# EAGLE board Panelized-CC3-MPI-26-3124-Satellite-Board-CoCo-3-Upgrade-2009-V1RA (EAGLE 9.4.0)
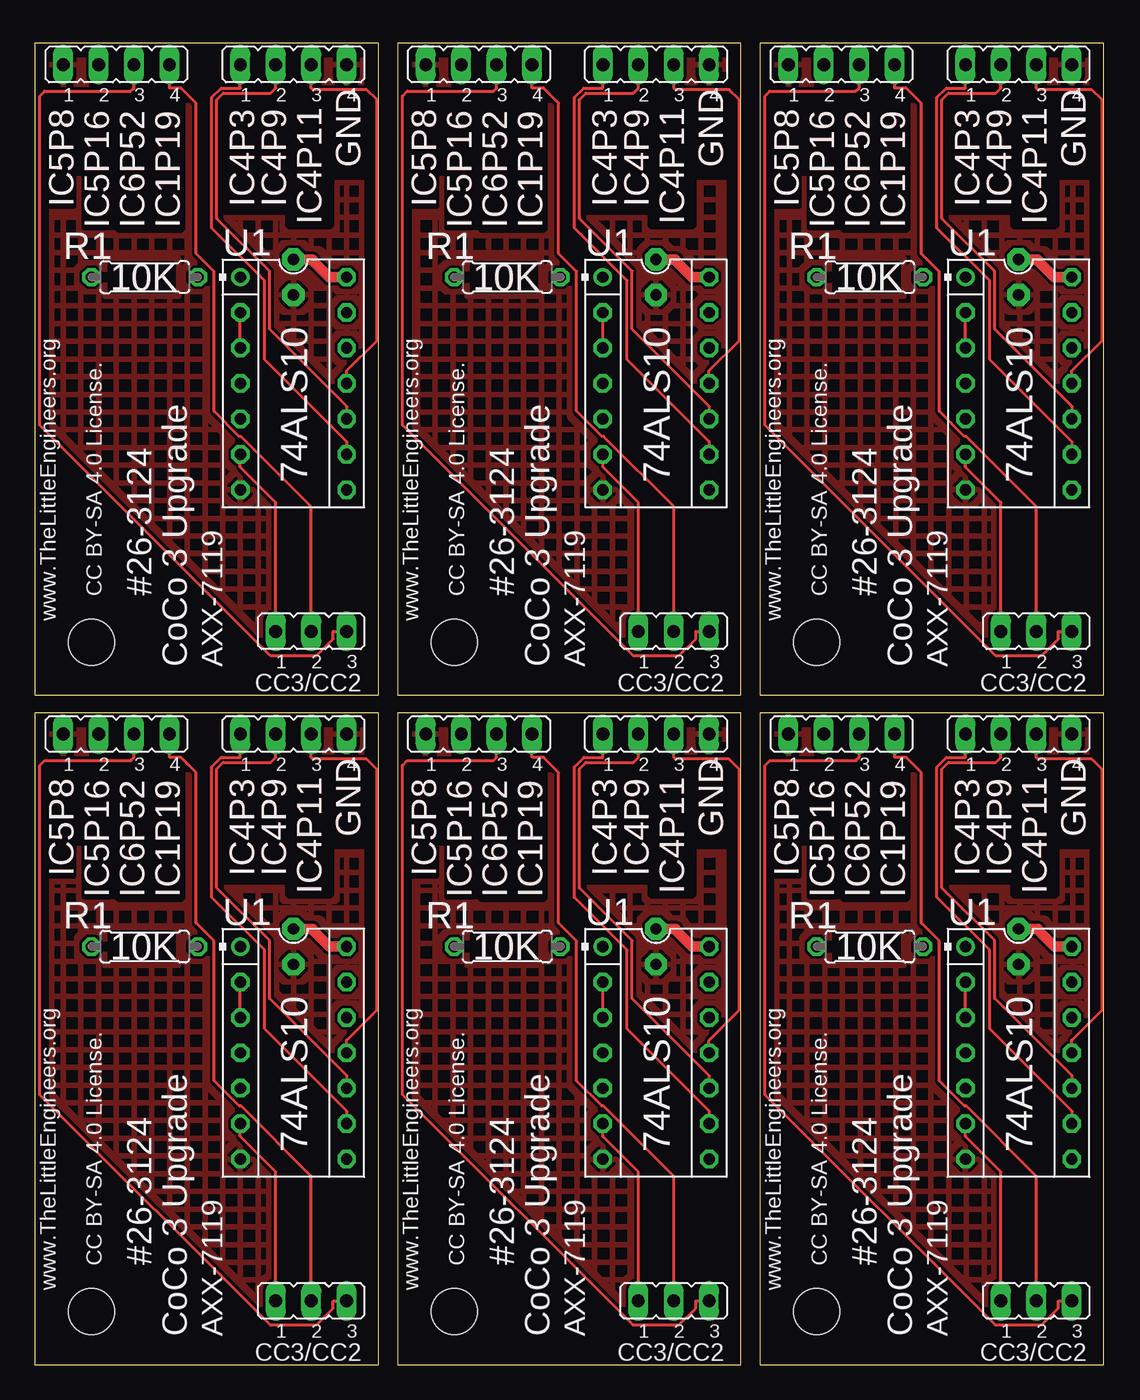
[diagram p0: board, top side]
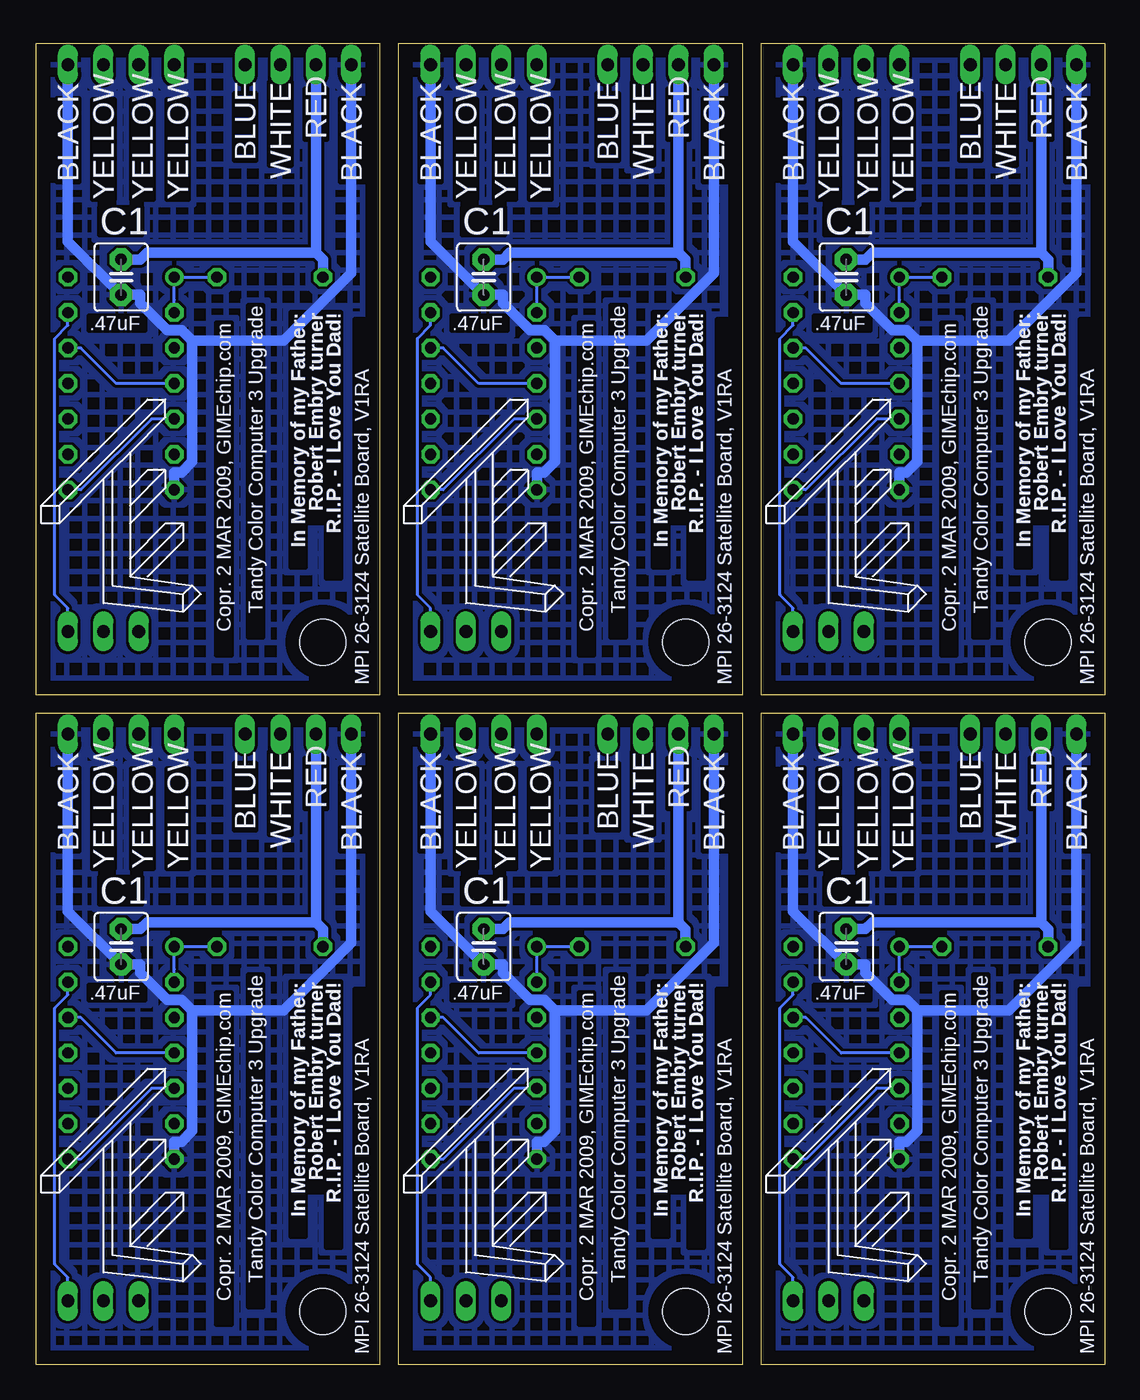
[diagram p1: board, bottom side, seen from below]

Size 76.64 x 94.74 mm. Coordinates in mm from the lower left corner, seen from the top.
Outline: 0,94.74 0,48 24.64,48 24.64,94.74 0,94.74
Outline: 0,46.74 0,0 24.64,0 24.64,46.74 0,46.74
Outline: 26,94.74 26,48 50.64,48 50.64,94.74 26,94.74
Outline: 26,46.74 26,0 50.64,0 50.64,46.74 26,46.74
Outline: 52,94.74 52,48 76.64,48 76.64,94.74 52,94.74
Outline: 52,46.74 52,0 76.64,0 76.64,46.74 52,46.74
Copper layers (1*16): Top 0.035mm / dielectric 1.5mm / Bottom 0.035mm
Design rules "default": minimum track width 10mil, minimum drill 24mil, track to track 8mil, track to pad 8mil, pad to pad 8mil, via to via 8mil, smd to smd 8mil, copper to edge 40mil, drill to drill 8mil, minimum pad ring 10mil, minimum via ring 8mil, stop-mask expansion 4mil, vias tented up to drill 0mil, thermal gap 10mil
Net classes: 0 default: width 0.203 mm, clearance 0.152 mm; 1 power: width 0.762 mm, clearance 0.203 mm
tRestrict: area 1,81.5 to 10.4,90.7; area 13.7,81.8 to 23.9,90.4; area 1,33.5 to 10.4,42.7; area 13.7,33.8 to 23.9,42.4; area 27,81.5 to 36.4,90.7; area 39.7,81.8 to 49.9,90.4; area 27,33.5 to 36.4,42.7; area 39.7,33.8 to 49.9,42.4; area 53,81.5 to 62.4,90.7; area 65.7,81.8 to 75.9,90.4; area 53,33.5 to 62.4,42.7; area 65.7,33.8 to 75.9,42.4

## Footprints (pad centres in the part's own frame; a part is rotated, then mirrored left to right if it is on the bottom)
C2.5-4 = drill 0.813 pad 1.6 octagon: 1 -1.27,0; 2 1.27,0
DIL14-3 = drill 0.813: 1 -7.62,-3.81 | drill 0.813 octagon: 2 -5.08,-3.81; 3 -2.54,-3.81; 4 0,-3.81; 5 2.54,-3.81; 6 5.08,-3.81; 7 7.62,-3.81; 8 7.62,3.81; 9 5.08,3.81; 10 2.54,3.81; 11 0,3.81; 12 -2.54,3.81; 13 -5.08,3.81; 14 -7.62,3.81
JP4 = drill 0.914 long: 1 -3.81,0; 2 -1.27,0; 3 1.27,0; 4 3.81,0
JP2 = drill 0.914 long: 1 -2.54,0; 2 0,0; 3 2.54,0
0207/7 = drill 0.813 octagon: 1 -3.81,0; 2 3.81,0
SPARKFUN_STAND-OFF = hole 3.302: 0,0

## Placement (x,y rotation side)
C1  .47uF  [C2.5-4]  18.54,77.97 270 bottom
C2  .47uF  [C2.5-4]  18.54,29.97 270 bottom
C3  .47uF  [C2.5-4]  44.54,77.97 270 bottom
C4  .47uF  [C2.5-4]  44.54,29.97 270 bottom
C5  .47uF  [C2.5-4]  70.54,77.97 270 bottom
C6  .47uF  [C2.5-4]  70.54,29.97 270 bottom
IC1  74ALS10N  [DIL14-3]  18.54,70.35 270 top
IC2  74ALS10N  [DIL14-3]  18.54,22.35 270 top
IC3  74ALS10N  [DIL14-3]  44.54,70.35 270 top
IC4  74ALS10N  [DIL14-3]  44.54,22.35 270 top
IC5  74ALS10N  [DIL14-3]  70.54,70.35 270 top
IC6  74ALS10N  [DIL14-3]  70.54,22.35 270 top
JP1  [JP4]  5.84,93.21 0 top
JP2  CC3/CC2  [JP2]  19.81,52.57 0 top
JP3  [JP4]  18.54,93.21 0 top
JP4  CC3/CC2  [JP2]  19.81,4.57 0 top
JP5  [JP4]  5.84,45.21 0 top
JP6  [JP4]  18.54,45.21 0 top
JP7  CC3/CC2  [JP2]  45.81,52.57 0 top
JP8  [JP4]  31.84,93.21 0 top
JP9  [JP4]  44.54,93.21 0 top
JP10  CC3/CC2  [JP2]  45.81,4.57 0 top
JP11  [JP4]  31.84,45.21 0 top
JP12  [JP4]  44.54,45.21 0 top
JP13  CC3/CC2  [JP2]  71.81,52.57 0 top
JP14  [JP4]  57.84,93.21 0 top
JP15  [JP4]  70.54,93.21 0 top
JP16  CC3/CC2  [JP2]  71.81,4.57 0 top
JP17  [JP4]  57.84,45.21 0 top
JP18  [JP4]  70.54,45.21 0 top
R1  10K  [0207/7]  7.87,77.97 180 top
R2  10K  [0207/7]  7.87,29.97 180 top
R3  10K  [0207/7]  33.87,77.97 180 top
R4  10K  [0207/7]  33.87,29.97 180 top
R5  10K  [0207/7]  59.87,77.97 180 top
R6  10K  [0207/7]  59.87,29.97 180 top
U$1  SPARKFUN_STAND-OFF  [SPARKFUN_STAND-OFF]  4.06,51.81 0 top
U$2  [TLE-LOGO-13]  19.81,54.6 0 bottom
U$3  SPARKFUN_STAND-OFF  [SPARKFUN_STAND-OFF]  4.06,3.81 0 top
U$4  [TLE-LOGO-13]  19.81,6.6 0 bottom
U$5  SPARKFUN_STAND-OFF  [SPARKFUN_STAND-OFF]  30.06,51.81 0 top
U$6  [TLE-LOGO-13]  45.81,54.6 0 bottom
U$7  SPARKFUN_STAND-OFF  [SPARKFUN_STAND-OFF]  30.06,3.81 0 top
U$8  [TLE-LOGO-13]  45.81,6.6 0 bottom
U$9  SPARKFUN_STAND-OFF  [SPARKFUN_STAND-OFF]  56.06,51.81 0 top
U$10  [TLE-LOGO-13]  71.81,54.6 0 bottom
U$11  SPARKFUN_STAND-OFF  [SPARKFUN_STAND-OFF]  56.06,3.81 0 top
U$12  [TLE-LOGO-13]  71.81,6.6 0 bottom

## Library data of the parts
C1-C6 = capacitor-wima
IC1-IC6 = RetroZilla.org-74xx-us
JP1-JP18 = jumper
R1-R6 = rcl-2
U$1 U$3 U$5 U$7 U$9 U$11 = FDC
U$2 U$4 U$6 U$8 U$10 U$12 = TLE_LOGOS

## Nets
CC1: IC2.6 JP4.1
CC2: IC3.6 JP7.1
CC3: IC1.6 JP2.1
CC4: IC4.6 JP10.1
CC5: IC5.6 JP13.1
CC6: IC6.6 JP16.1
GND [power]: C1.2 IC1.7 JP1.1 JP3.4
GND1 [power]: C2.2 IC2.7 JP5.1 JP6.4
GND2 [power]: C3.2 IC3.7 JP8.1 JP9.4
GND3 [power]: C4.2 IC4.7 JP11.1 JP12.4
GND4 [power]: C5.2 IC5.7 JP14.1 JP15.4
GND5 [power]: C6.2 IC6.7 JP17.1 JP18.4
IC1P1: JP4.2 JP5.4
IC1P2: JP7.2 JP8.4
IC1P3: JP10.2 JP11.4
IC1P4: JP13.2 JP14.4
IC1P5: JP16.2 JP17.4
IC1P19: JP1.4 JP2.2
IC4P1: IC2.9 JP6.1
IC4P2: IC2.10 JP6.2
IC4P3: IC1.9 JP3.1
IC4P4: IC2.11 JP6.3
IC4P5: IC3.9 JP9.1
IC4P6: IC3.10 JP9.2
IC4P7: IC3.11 JP9.3
IC4P8: IC4.9 JP12.1
IC4P9: IC1.10 JP3.2
IC4P10: IC4.10 JP12.2
IC4P11: IC1.11 JP3.3
IC4P12: IC4.11 JP12.3
IC4P13: IC5.9 JP15.1
IC4P14: IC5.10 JP15.2
IC4P15: IC5.11 JP15.3
IC4P16: IC6.9 JP18.1
IC4P17: IC6.10 JP18.2
IC4P18: IC6.11 JP18.3
IC6P1: IC2.13 JP4.3 JP5.3
IC6P2: IC3.13 JP7.3 JP8.3
IC6P3: IC4.13 JP10.3 JP11.3
IC6P4: IC5.13 JP13.3 JP14.3
IC6P5: IC6.13 JP16.3 JP17.3
IC6P52: IC1.13 JP1.3 JP2.3
N$1: IC2.1 IC2.2 IC2.3 R2.1
N$2: IC2.4 IC2.12
N$3: IC2.5 IC2.8
N$4: IC3.1 IC3.2 IC3.3 R3.1
N$5: IC3.4 IC3.12
N$6: IC1.1 IC1.2 IC1.3 R1.1
N$7: IC3.5 IC3.8
N$8: IC1.4 IC1.12
N$9: IC1.5 IC1.8
N$10: IC4.1 IC4.2 IC4.3 R4.1
N$11: IC4.4 IC4.12
N$12: IC4.5 IC4.8
N$13: IC5.1 IC5.2 IC5.3 R5.1
N$14: IC5.4 IC5.12
N$15: IC5.5 IC5.8
N$16: IC6.1 IC6.2 IC6.3 R6.1
N$17: IC6.4 IC6.12
N$18: IC6.5 IC6.8
VCC [power]: C1.1 IC1.14 JP1.2 R1.2
VCC1 [power]: C2.1 IC2.14 JP5.2 R2.2
VCC2 [power]: C3.1 IC3.14 JP8.2 R3.2
VCC3 [power]: C4.1 IC4.14 JP11.2 R4.2
VCC4 [power]: C5.1 IC5.14 JP14.2 R5.2
VCC5 [power]: C6.1 IC6.14 JP17.2 R6.2

## Tracks (layer width: path | path; a pad name or v marks a point on that pad's centre or on a via)
CC1
  Top 0.203: IC2.6 14.73,16.36 17.27,13.82 JP4.1
CC2
  Top 0.203: IC3.6 40.73,64.36 43.27,61.82 JP7.1
CC3
  Top 0.203: IC1.6 14.73,64.36 17.27,61.82 JP2.1
CC4
  Top 0.203: IC4.6 40.73,16.36 43.27,13.82 JP10.1
CC5
  Top 0.203: IC5.6 66.73,64.36 69.27,61.82 JP13.1
CC6
  Top 0.203: IC6.6 66.73,16.36 69.27,13.82 JP16.1
GND
  Bottom 0.762: 13.44,73.4 13.44,64.76 14.22,63.98 14.73,63.98 IC1.7 | 13.44,73.4 14.19,74.16 15.22,74.16 17.16,76.1 17.16,76.7 C1.2 22.35,80.51 JP3.4 | JP1.1 2.03,78.24 6.87,73.4 13.44,73.4
  pour Top (hatched): -0.51,95.75 24.89,95.75 24.89,47.49 -0.51,47.49
  pour Bottom (hatched): -0.51,95.75 24.89,95.75 24.89,47.49 -0.51,47.49
GND1
  Bottom 0.762: 13.44,25.4 13.44,16.76 14.22,15.98 14.73,15.98 IC2.7 | 13.44,25.4 14.19,26.16 15.22,26.16 17.16,28.1 17.16,28.7 C2.2 22.35,32.51 JP6.4 | JP5.1 2.03,30.24 6.87,25.4 13.44,25.4
  pour Top (hatched): -0.51,47.75 24.89,47.75 24.89,-0.51 -0.51,-0.51
  pour Bottom (hatched): -0.51,47.75 24.89,47.75 24.89,-0.51 -0.51,-0.51
GND2
  Bottom 0.762: 39.44,73.4 39.44,64.76 40.22,63.98 40.73,63.98 IC3.7 | 39.44,73.4 40.19,74.16 41.22,74.16 43.16,76.1 43.16,76.7 C3.2 48.35,80.51 JP9.4 | JP8.1 28.03,78.24 32.87,73.4 39.44,73.4
  pour Top (hatched): 25.49,95.75 50.89,95.75 50.89,47.49 25.49,47.49
  pour Bottom (hatched): 25.49,95.75 50.89,95.75 50.89,47.49 25.49,47.49
GND3
  Bottom 0.762: 39.44,25.4 39.44,16.76 40.22,15.98 40.73,15.98 IC4.7 | 39.44,25.4 40.19,26.16 41.22,26.16 43.16,28.1 43.16,28.7 C4.2 48.35,32.51 JP12.4 | JP11.1 28.03,30.24 32.87,25.4 39.44,25.4
  pour Top (hatched): 25.49,47.75 50.89,47.75 50.89,-0.51 25.49,-0.51
  pour Bottom (hatched): 25.49,47.75 50.89,47.75 50.89,-0.51 25.49,-0.51
GND4
  Bottom 0.762: 65.44,73.4 65.44,64.76 66.22,63.98 66.73,63.98 IC5.7 | 65.44,73.4 66.19,74.16 67.22,74.16 69.16,76.1 69.16,76.7 C5.2 74.35,80.51 JP15.4 | JP14.1 54.03,78.24 58.87,73.4 65.44,73.4
  pour Top (hatched): 51.49,95.75 76.89,95.75 76.89,47.49 51.49,47.49
  pour Bottom (hatched): 51.49,95.75 76.89,95.75 76.89,47.49 51.49,47.49
GND5
  Bottom 0.762: 65.44,25.4 65.44,16.76 66.22,15.98 66.73,15.98 IC6.7 | 65.44,25.4 66.19,26.16 67.22,26.16 69.16,28.1 69.16,28.7 C6.2 74.35,32.51 JP18.4 | JP17.1 54.03,30.24 58.87,25.4 65.44,25.4
  pour Top (hatched): 51.49,47.75 76.89,47.75 76.89,-0.51 51.49,-0.51
  pour Bottom (hatched): 51.49,47.75 76.89,47.75 76.89,-0.51 51.49,-0.51
IC1P1
  Top 0.203: JP5.4 9.65,43.54 10.48,43.54 11.56,42.45 11.56,31.67 12.85,30.37 12.85,20.36 14.66,18.54 14.79,18.54 19.81,13.52 JP4.2
IC1P2
  Top 0.203: JP8.4 35.65,91.53 36.48,91.53 37.56,90.45 37.56,79.67 38.85,78.37 38.85,68.36 40.66,66.54 40.79,66.54 45.81,61.52 JP7.2
IC1P3
  Top 0.203: JP11.4 35.65,43.54 36.48,43.54 37.56,42.45 37.56,31.67 38.85,30.37 38.85,20.36 40.66,18.54 40.79,18.54 45.81,13.52 JP10.2
IC1P4
  Top 0.203: JP14.4 61.65,91.53 62.48,91.53 63.56,90.45 63.56,79.67 64.85,78.37 64.85,68.36 66.67,66.54 66.79,66.54 71.81,61.52 JP13.2
IC1P5
  Top 0.203: JP17.4 61.65,43.54 62.48,43.54 63.56,42.45 63.56,31.67 64.85,30.37 64.85,20.36 66.67,18.54 66.79,18.54 71.81,13.52 JP16.2
IC1P19
  Top 0.203: JP1.4 9.65,91.53 10.48,91.53 11.56,90.45 11.56,79.67 12.85,78.37 12.85,68.36 14.66,66.54 14.79,66.54 19.81,61.52 JP2.2
IC4P1
  Top 0.203: IC2.9 22.35,18.19 16.46,24.08 16.46,29.73 12.69,33.5 12.69,42.86 13.37,43.54 14.73,43.54 JP6.1
IC4P2
  Top 0.203: IC2.10 22.35,20.73 16.82,26.26 16.82,30.41 13.05,34.18 13.05,42.71 13.52,43.18 16.92,43.18 17.27,43.54 JP6.2
IC4P3
  Top 0.203: IC1.9 22.35,66.19 16.46,72.08 16.46,77.72 12.69,81.5 12.69,90.86 13.37,91.53 14.73,91.53 JP3.1
IC4P4
  Top 0.203: IC2.11 22.35,23.27 24.52,25.44 24.52,42.68 23.78,43.42 19.93,43.42 19.81,43.54 JP6.3
IC4P5
  Top 0.203: IC3.9 48.35,66.19 42.46,72.08 42.46,77.72 38.69,81.5 38.69,90.86 39.37,91.53 40.73,91.53 JP9.1
IC4P6
  Top 0.203: IC3.10 48.35,68.73 42.82,74.26 42.82,78.41 39.05,82.18 39.05,90.71 39.52,91.18 42.92,91.18 43.27,91.53 JP9.2
IC4P7
  Top 0.203: IC3.11 48.35,71.27 50.52,73.44 50.52,90.68 49.78,91.42 45.92,91.42 45.81,91.53 JP9.3
IC4P8
  Top 0.203: IC4.9 48.35,18.19 42.46,24.08 42.46,29.73 38.69,33.5 38.69,42.86 39.37,43.54 40.73,43.54 JP12.1
IC4P9
  Top 0.203: IC1.10 22.35,68.73 16.82,74.26 16.82,78.41 13.05,82.18 13.05,90.71 13.52,91.18 16.92,91.18 17.27,91.53 JP3.2
IC4P10
  Top 0.203: IC4.10 48.35,20.73 42.82,26.26 42.82,30.41 39.05,34.18 39.05,42.71 39.52,43.18 42.92,43.18 43.27,43.54 JP12.2
IC4P11
  Top 0.203: IC1.11 22.35,71.27 24.52,73.44 24.52,90.68 23.78,91.42 19.93,91.42 19.81,91.53 JP3.3
IC4P12
  Top 0.203: IC4.11 48.35,23.27 50.52,25.44 50.52,42.68 49.78,43.42 45.92,43.42 45.81,43.54 JP12.3
IC4P13
  Top 0.203: IC5.9 74.35,66.19 68.46,72.08 68.46,77.72 64.69,81.5 64.69,90.86 65.37,91.53 66.73,91.53 JP15.1
IC4P14
  Top 0.203: IC5.10 74.35,68.73 68.82,74.26 68.82,78.41 65.05,82.18 65.05,90.71 65.52,91.18 68.92,91.18 69.27,91.53 JP15.2
IC4P15
  Top 0.203: IC5.11 74.35,71.27 76.52,73.44 76.52,90.68 75.78,91.42 71.92,91.42 71.81,91.53 JP15.3
IC4P16
  Top 0.203: IC6.9 74.35,18.19 68.46,24.08 68.46,29.73 64.69,33.5 64.69,42.86 65.37,43.54 66.73,43.54 JP18.1
IC4P17
  Top 0.203: IC6.10 74.35,20.73 68.82,26.26 68.82,30.41 65.05,34.18 65.05,42.71 65.52,43.18 68.92,43.18 69.27,43.54 JP18.2
IC4P18
  Top 0.203: IC6.11 74.35,23.27 76.52,25.44 76.52,42.68 75.78,43.42 71.92,43.42 71.81,43.54 JP18.3
IC6P1
  Top 0.203: JP4.3 21.39,4.57 21.39,4.04 20.19,2.85 16.87,2.85 0.36,19.36 0.36,42.96 0.71,43.31 6.88,43.31 7.11,43.54 JP5.3
  Bottom 0.203: IC2.13 22.35,26.52 23.3,25.57 23.3,7.2 22.35,6.25 JP4.3
IC6P2
  Top 0.203: JP7.3 47.39,52.57 47.39,52.04 46.19,50.84 42.87,50.84 26.36,67.36 26.36,90.96 26.7,91.31 32.88,91.31 33.11,91.53 JP8.3
  Bottom 0.203: IC3.13 48.35,74.52 49.3,73.57 49.3,55.2 48.35,54.25 JP7.3
IC6P3
  Top 0.203: JP10.3 47.39,4.57 47.39,4.04 46.19,2.85 42.87,2.85 26.36,19.36 26.36,42.96 26.7,43.31 32.88,43.31 33.11,43.54 JP11.3
  Bottom 0.203: IC4.13 48.35,26.52 49.3,25.57 49.3,7.2 48.35,6.25 JP10.3
IC6P4
  Top 0.203: JP13.3 73.39,52.57 73.39,52.04 72.19,50.84 68.87,50.84 52.36,67.36 52.36,90.96 52.7,91.31 58.88,91.31 59.11,91.53 JP14.3
  Bottom 0.203: IC5.13 74.35,74.52 75.3,73.57 75.3,55.2 74.35,54.25 JP13.3
IC6P5
  Top 0.203: JP16.3 73.39,4.57 73.39,4.04 72.19,2.85 68.87,2.85 52.36,19.36 52.36,42.96 52.7,43.31 58.88,43.31 59.11,43.54 JP17.3
  Bottom 0.203: IC6.13 74.35,26.52 75.3,25.57 75.3,7.2 74.35,6.25 JP16.3
IC6P52
  Top 0.203: JP2.3 21.39,52.57 21.39,52.04 20.19,50.84 16.87,50.84 0.36,67.36 0.36,90.96 0.71,91.31 6.88,91.31 7.11,91.53 JP1.3
  Bottom 0.203: IC1.13 22.35,74.52 23.3,73.57 23.3,55.2 22.35,54.25 JP2.3
N$1
  Top 0.203: IC2.3 IC2.2
  Bottom 0.203: IC2.2 14.73,28.35 IC2.1 R2.1
N$2
  Bottom 0.203: IC2.12 21.44,24.89 18.9,22.35 IC2.4
N$3
  Bottom 0.203: IC2.8 21.44,14.73 16.36,19.81 IC2.5
N$4
  Top 0.203: IC3.3 IC3.2
  Bottom 0.203: IC3.2 40.73,76.35 IC3.1 R3.1
N$5
  Bottom 0.203: IC3.12 47.44,72.89 44.9,70.35 IC3.4
N$6
  Top 0.203: IC1.3 IC1.2
  Bottom 0.203: IC1.2 14.73,76.35 IC1.1 R1.1
N$7
  Bottom 0.203: IC3.8 47.44,62.73 42.36,67.81 IC3.5
N$8
  Bottom 0.203: IC1.12 21.44,72.89 18.9,70.35 IC1.4
N$9
  Bottom 0.203: IC1.8 21.44,62.73 16.36,67.81 IC1.5
N$10
  Top 0.203: IC4.3 IC4.2
  Bottom 0.203: IC4.2 40.73,28.35 IC4.1 R4.1
N$11
  Bottom 0.203: IC4.12 47.44,24.89 44.9,22.35 IC4.4
N$12
  Bottom 0.203: IC4.8 47.44,14.73 42.36,19.81 IC4.5
N$13
  Top 0.203: IC5.3 IC5.2
  Bottom 0.203: IC5.2 66.73,76.35 IC5.1 R5.1
N$14
  Bottom 0.203: IC5.12 73.44,72.89 70.9,70.35 IC5.4
N$15
  Bottom 0.203: IC5.8 73.44,62.73 68.36,67.81 IC5.5
N$16
  Top 0.203: IC6.3 IC6.2
  Bottom 0.203: IC6.2 66.73,28.35 IC6.1 R6.1
N$17
  Bottom 0.203: IC6.12 73.44,24.89 70.9,22.35 IC6.4
N$18
  Bottom 0.203: IC6.8 73.44,14.73 68.36,19.81 IC6.5
VCC
  Top 0.762: C1.1 19.93,79.24 19.93,79.15 21.11,77.97 IC1.14
  Bottom 0.762: C1.1 17.16,79.24 16.68,79.72 4.57,79.72 | 4.57,79.72 JP1.2 | 4.57,79.72 4.06,79.22 R1.2
VCC1
  Top 0.762: C2.1 19.93,31.24 19.93,31.15 21.11,29.97 IC2.14
  Bottom 0.762: C2.1 17.16,31.24 16.68,31.73 4.57,31.73 | 4.57,31.73 JP5.2 | 4.57,31.73 4.06,31.22 R2.2
VCC2
  Top 0.762: C3.1 45.93,79.24 45.93,79.15 47.11,77.97 IC3.14
  Bottom 0.762: C3.1 43.16,79.24 42.67,79.72 30.57,79.72 | 30.57,79.72 JP8.2 | 30.57,79.72 30.06,79.22 R3.2
VCC3
  Top 0.762: C4.1 45.93,31.24 45.93,31.15 47.11,29.97 IC4.14
  Bottom 0.762: C4.1 43.16,31.24 42.67,31.73 30.57,31.73 | 30.57,31.73 JP11.2 | 30.57,31.73 30.06,31.22 R4.2
VCC4
  Top 0.762: C5.1 71.93,79.24 71.93,79.15 73.11,77.97 IC5.14
  Bottom 0.762: C5.1 69.16,79.24 68.67,79.72 56.57,79.72 | 56.57,79.72 JP14.2 | 56.57,79.72 56.06,79.22 R5.2
VCC5
  Top 0.762: C6.1 71.93,31.24 71.93,31.15 73.11,29.97 IC6.14
  Bottom 0.762: C6.1 69.16,31.24 68.67,31.73 56.57,31.73 | 56.57,31.73 JP17.2 | 56.57,31.73 56.06,31.22 R6.2

## Text on the board
Top: GND | GND | GND | IC5P8 | IC4P3 | IC4P9 | IC5P8 | IC4P3 | IC4P9 | IC5P8 | IC4P3 | IC4P9 | IC5P16 | IC6P52 | IC1P19 | IC4P11 | IC5P16 | IC6P52 | IC1P19 | IC4P11 | IC5P16 | IC6P52 | IC1P19 | IC4P11 | 10K | 10K | 10K | GND | GND | GND | IC5P8 | IC4P3 | IC4P9 | IC5P8 | IC4P3 | IC4P9 | IC5P8 | IC4P3 | IC4P9 | IC5P16 | IC6P52 | IC1P19 | IC4P11 | IC5P16 | IC6P52 | IC1P19 | IC4P11 | IC5P16 | IC6P52 | IC1P19 | IC4P11 | 10K | 10K | 10K
Bottom: WHITE | WHITE | WHITE | RED | RED | RED | BLUE | BLUE | BLUE | BLACK | BLACK | BLACK | BLACK | BLACK | BLACK | YELLOW | YELLOW | YELLOW | YELLOW | YELLOW | YELLOW | YELLOW | YELLOW | YELLOW | C1 | C1 | C1 | R.I.P. - I Love You Dad! | Robert Embry turner | In Memory of my Father: | Tandy Color Computer 3 Upgrade | R.I.P. - I Love You Dad! | Robert Embry turner | In Memory of my Father: | Tandy Color Computer 3 Upgrade | R.I.P. - I Love You Dad! | Robert Embry turner | In Memory of my Father: | Tandy Color Computer 3 Upgrade | Copr. 2 MAR 2009, GIMEchip.com | Copr. 2 MAR 2009, GIMEchip.com | Copr. 2 MAR 2009, GIMEchip.com | .47uF | .47uF | .47uF | MPI 26-3124 Satellite Board, V1RA | MPI 26-3124 Satellite Board, V1RA | MPI 26-3124 Satellite Board, V1RA | WHITE | WHITE | WHITE | RED | RED | RED | BLUE | BLUE | BLUE | BLACK | BLACK | BLACK | BLACK | BLACK | BLACK | YELLOW | YELLOW | YELLOW | YELLOW | YELLOW | YELLOW | YELLOW | YELLOW | YELLOW | C1 | C1 | C1 | R.I.P. - I Love You Dad! | Robert Embry turner | In Memory of my Father: | Tandy Color Computer 3 Upgrade | R.I.P. - I Love You Dad! | Robert Embry turner | In Memory of my Father: | Tandy Color Computer 3 Upgrade | R.I.P. - I Love You Dad! | Robert Embry turner | In Memory of my Father: | Tandy Color Computer 3 Upgrade | Copr. 2 MAR 2009, GIMEchip.com | Copr. 2 MAR 2009, GIMEchip.com | Copr. 2 MAR 2009, GIMEchip.com | .47uF | .47uF | .47uF | MPI 26-3124 Satellite Board, V1RA | MPI 26-3124 Satellite Board, V1RA | MPI 26-3124 Satellite Board, V1RA
tPlace: GND | GND | GND | IC5P8 | IC4P3 | IC4P9 | IC5P8 | IC4P3 | IC4P9 | IC5P8 | IC4P3 | IC4P9 | IC5P16 | IC6P52 | IC1P19 | IC4P11 | IC5P16 | IC6P52 | IC1P19 | IC4P11 | IC5P16 | IC6P52 | IC1P19 | IC4P11 | U1 | U1 | U1 | R1 | R1 | R1 | 10K | 10K | 10K | 74ALS10 | 74ALS10 | 74ALS10 | CC BY-SA 4.0 License. | CC BY-SA 4.0 License. | CC BY-SA 4.0 License. | www.TheLittleEngineers.org | www.TheLittleEngineers.org | www.TheLittleEngineers.org | AXX-7119 | AXX-7119 | AXX-7119 | GND | GND | GND | IC5P8 | IC4P3 | IC4P9 | IC5P8 | IC4P3 | IC4P9 | IC5P8 | IC4P3 | IC4P9 | IC5P16 | IC6P52 | IC1P19 | IC4P11 | IC5P16 | IC6P52 | IC1P19 | IC4P11 | IC5P16 | IC6P52 | IC1P19 | IC4P11 | U1 | U1 | U1 | R1 | R1 | R1 | 10K | 10K | 10K | 74ALS10 | 74ALS10 | 74ALS10 | CC BY-SA 4.0 License. | CC BY-SA 4.0 License. | CC BY-SA 4.0 License. | www.TheLittleEngineers.org | www.TheLittleEngineers.org | www.TheLittleEngineers.org | AXX-7119 | AXX-7119 | AXX-7119
bPlace: WHITE | WHITE | WHITE | RED | RED | RED | BLUE | BLUE | BLUE | BLACK | BLACK | BLACK | BLACK | BLACK | BLACK | YELLOW | YELLOW | YELLOW | YELLOW | YELLOW | YELLOW | YELLOW | YELLOW | YELLOW | C1 | C1 | C1 | R.I.P. - I Love You Dad! | Robert Embry turner | In Memory of my Father: | Tandy Color Computer 3 Upgrade | R.I.P. - I Love You Dad! | Robert Embry turner | In Memory of my Father: | Tandy Color Computer 3 Upgrade | R.I.P. - I Love You Dad! | Robert Embry turner | In Memory of my Father: | Tandy Color Computer 3 Upgrade | Copr. 2 MAR 2009, GIMEchip.com | Copr. 2 MAR 2009, GIMEchip.com | Copr. 2 MAR 2009, GIMEchip.com | .47uF | .47uF | .47uF | MPI 26-3124 Satellite Board, V1RA | MPI 26-3124 Satellite Board, V1RA | MPI 26-3124 Satellite Board, V1RA | WHITE | WHITE | WHITE | RED | RED | RED | BLUE | BLUE | BLUE | BLACK | BLACK | BLACK | BLACK | BLACK | BLACK | YELLOW | YELLOW | YELLOW | YELLOW | YELLOW | YELLOW | YELLOW | YELLOW | YELLOW | C1 | C1 | C1 | R.I.P. - I Love You Dad! | Robert Embry turner | In Memory of my Father: | Tandy Color Computer 3 Upgrade | R.I.P. - I Love You Dad! | Robert Embry turner | In Memory of my Father: | Tandy Color Computer 3 Upgrade | R.I.P. - I Love You Dad! | Robert Embry turner | In Memory of my Father: | Tandy Color Computer 3 Upgrade | Copr. 2 MAR 2009, GIMEchip.com | Copr. 2 MAR 2009, GIMEchip.com | Copr. 2 MAR 2009, GIMEchip.com | .47uF | .47uF | .47uF | MPI 26-3124 Satellite Board, V1RA | MPI 26-3124 Satellite Board, V1RA | MPI 26-3124 Satellite Board, V1RA
_tsilk: #26-3124 | #26-3124 | #26-3124 | CoCo 3 Upgrade | CoCo 3 Upgrade | CoCo 3 Upgrade | #26-3124 | #26-3124 | #26-3124 | CoCo 3 Upgrade | CoCo 3 Upgrade | CoCo 3 Upgrade